# Altium PCB ESP32-AXIS3-6.0.PcbDoc (part 1 of 2)
Units mm, origin at the board's own origin, x right, y up, seen from the top; angles counter-clockwise.
Board outline 90.12 x 69.99 mm, 2 copper layers (TopLayer, BottomLayer); 125 components, 102 nets, 464 pads, 321 vias.
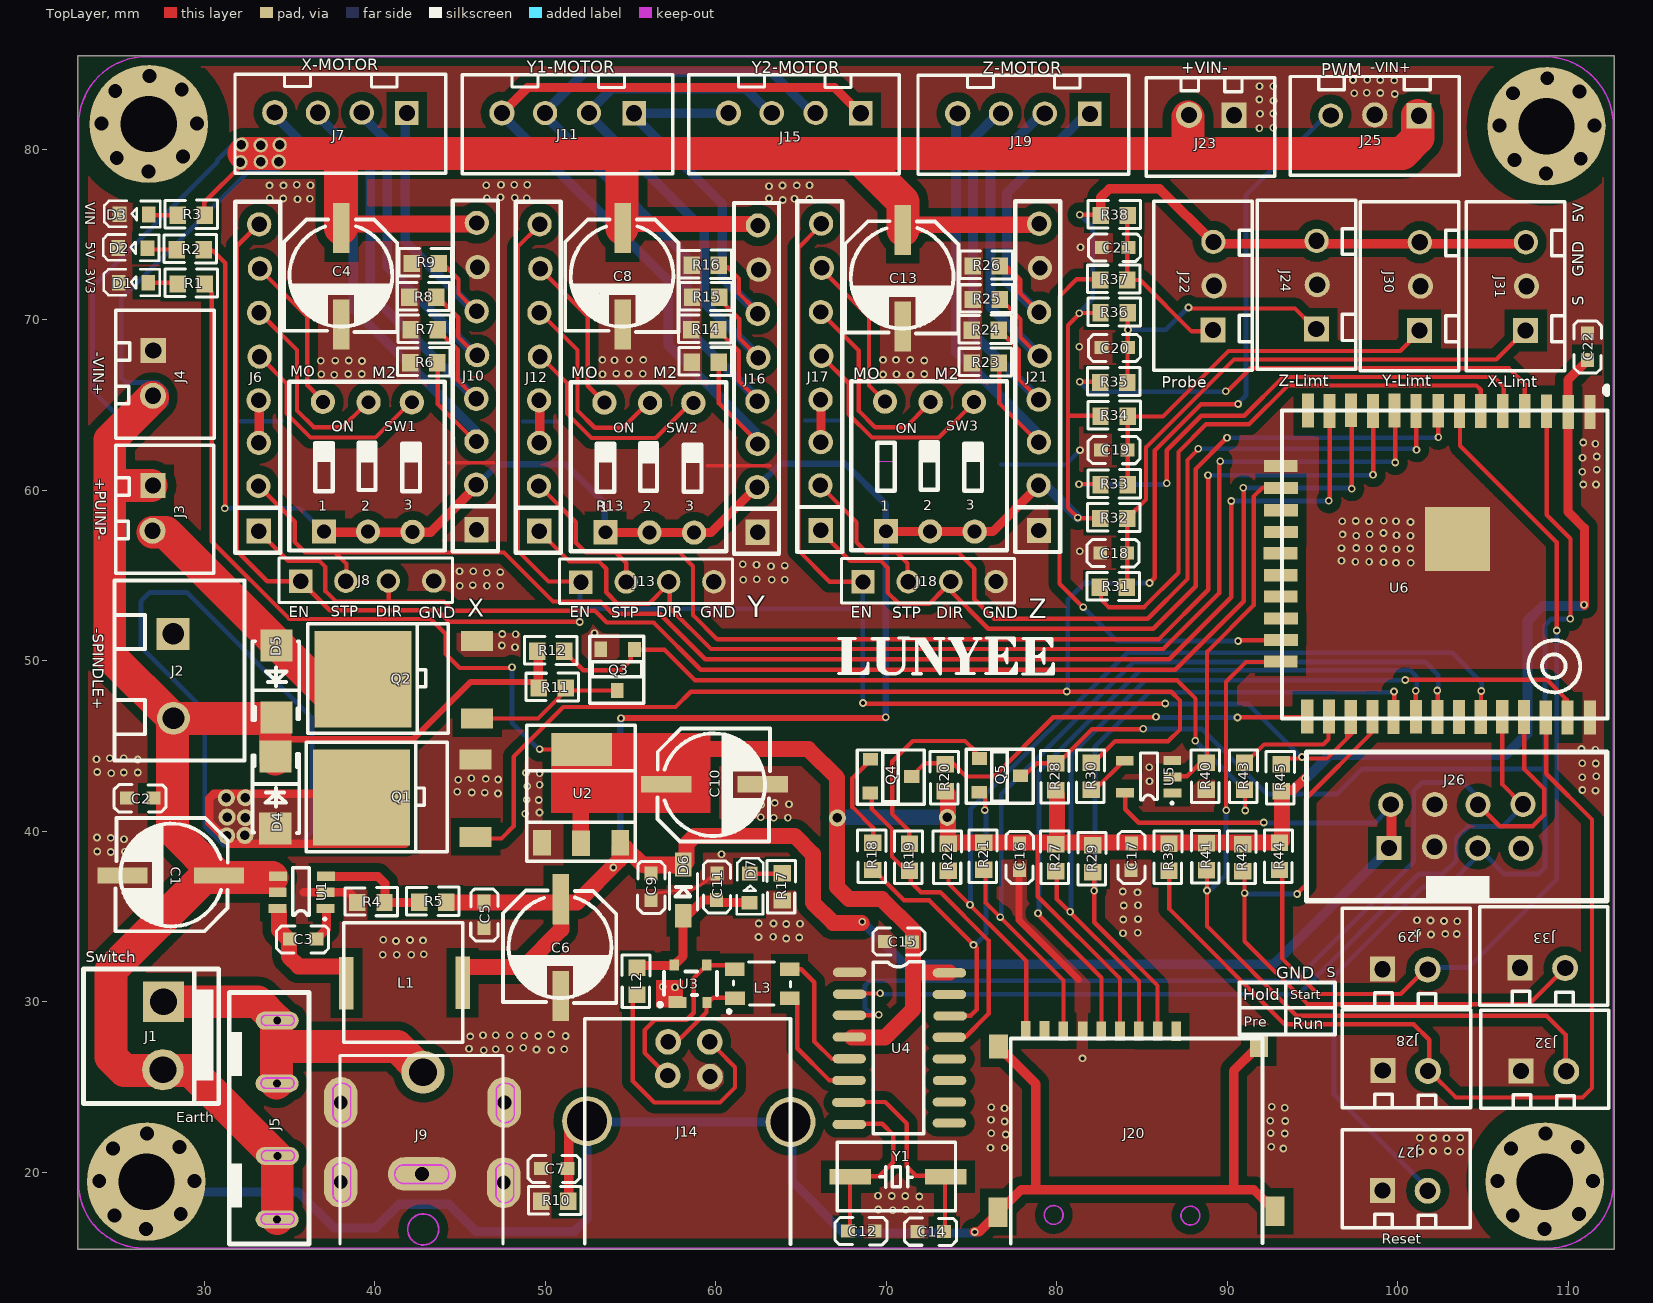
[diagram p0: TopLayer view]
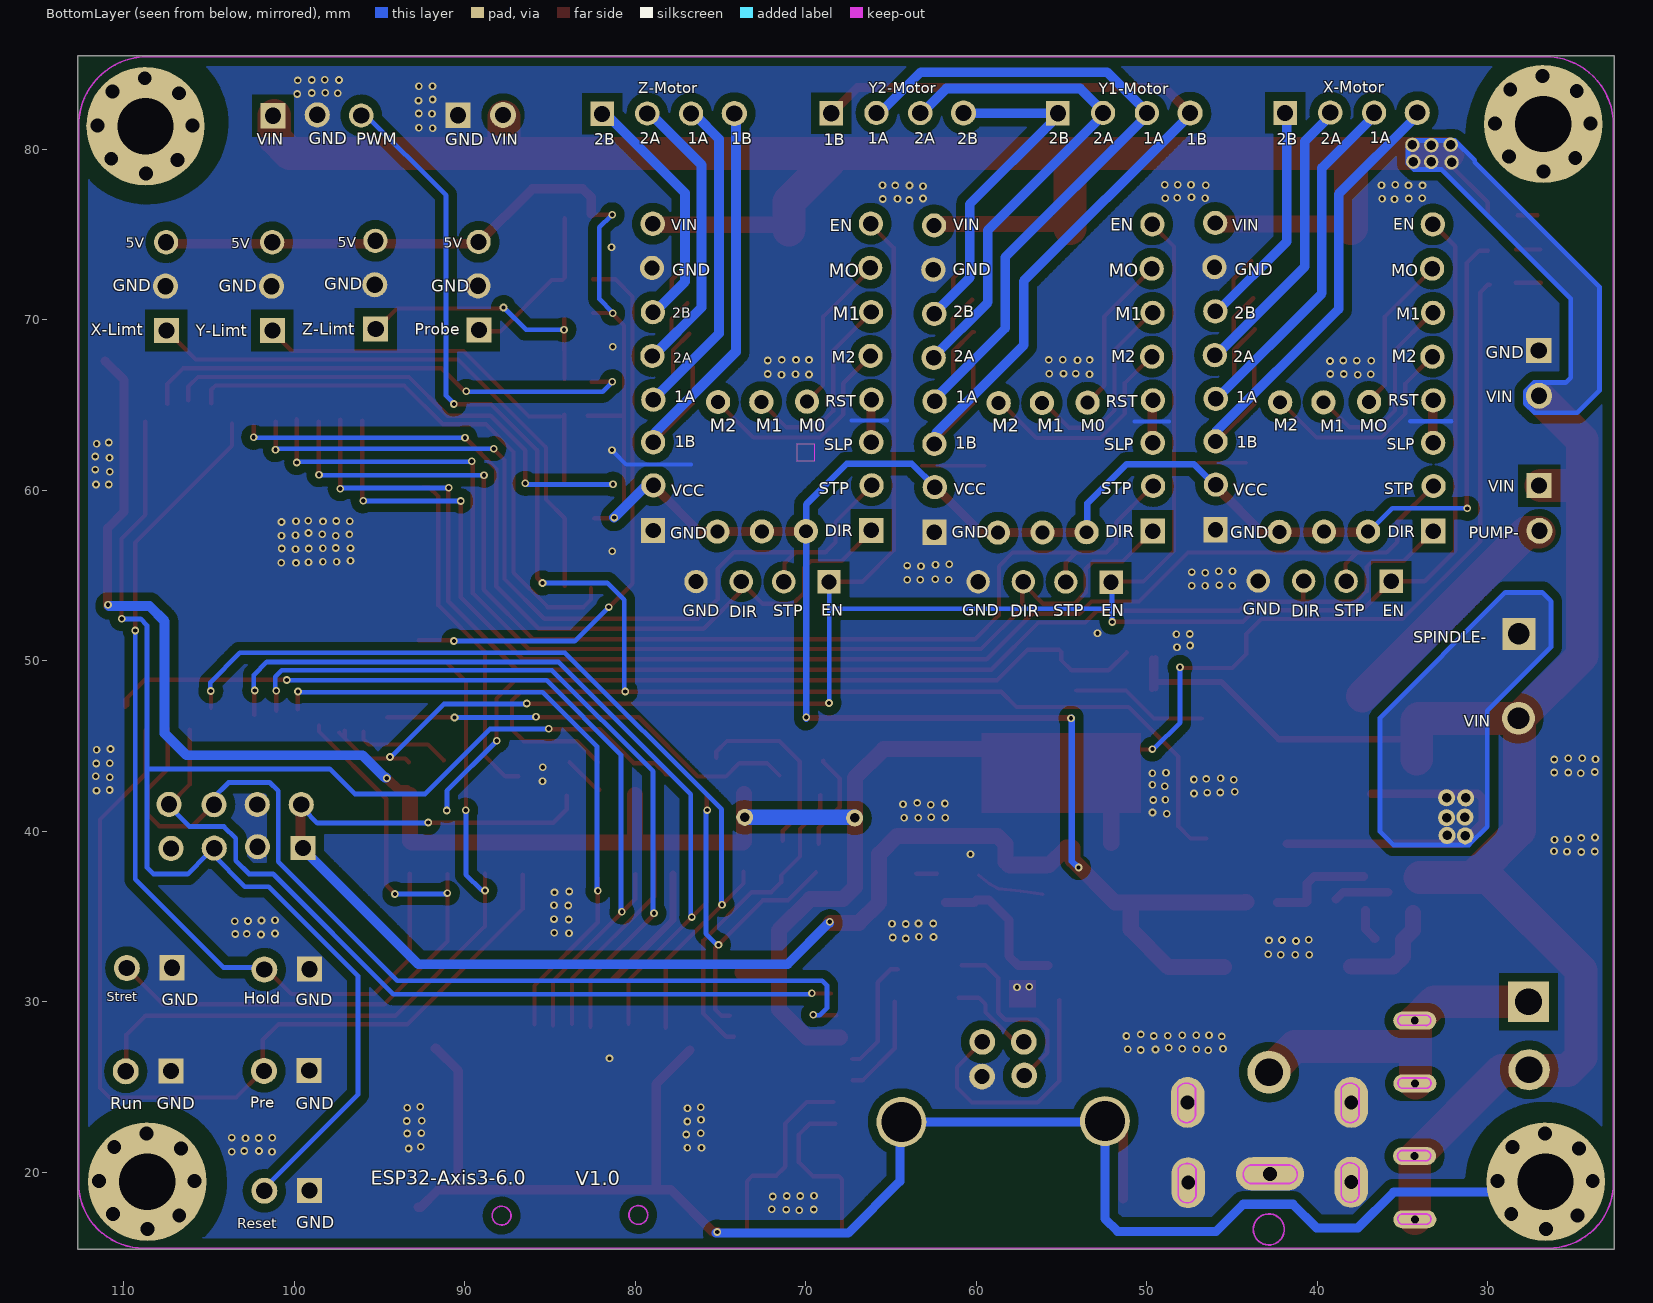
[diagram p1: BottomLayer view, seen from below]

## Layer stack, top to bottom
TopSolder: solder mask 0.0102, Solder Resist, Dk 3.5
TopLayer: signal copper 0.0356
Dielectric1: core 0.32, FR-4, Dk 4.8
BottomLayer: signal copper 0.0356
BottomSolder: solder mask 0.0102, Solder Resist, Dk 3.5

## Board outline
22.572,15.502 112.694,15.502 112.694,85.495 22.572,85.495

## Design rules (kind name [scope] priority, off if disabled: settings)
AssemblyTestPointUsage [All] p0: scope1count=1 scope1_0_kind=Board scope1_0_value=Board scope2count=1 scope2_0_kind=Board scope2_0_value=Board commentlength=0
AssemblyTestpoint [All] p0: scope1count=1 scope1_0_kind=Board scope1_0_value=Board scope2count=1 scope2_0_kind=Board scope2_0_value=Board commentlength=0
Clearance [All] p0: scope1count=1 scope1_0_kind=Board scope1_0_value=Board scope2count=1 scope2_0_kind=Board scope2_0_value=Board commentlength=0 gap=0.2
Clearance [All] p1: gap=0.2
ComponentClearance [All] p0: scope1count=1 scope1_0_kind=Board scope1_0_value=Board scope2count=1 scope2_0_kind=Board scope2_0_value=Board commentlength=0 gap=0.254 collisioncheckmode=3
DiffPairsRouting [All] p0: scope1count=1 scope1_0_kind=Board scope1_0_value=Board scope2count=1 scope2_0_kind=Board scope2_0_value=Board commentlength=0
FabricationTestPointUsage TestPointUsage [All] p0: scope1count=1 scope1_0_kind=Board scope1_0_value=Board scope2count=1 scope2_0_kind=Board scope2_0_value=Board commentlength=0 valid=0 allowmultiple=FALSE
FabricationTestPointUsage TestPointUsage [All] p1: valid=0 allowmultiple=FALSE
FabricationTestpoint Testpoint [All] p0: scope1count=1 scope1_0_kind=Board scope1_0_value=Board scope2count=1 scope2_0_kind=Board scope2_0_value=Board commentlength=0 side=3 testpointundercomponent=TRUE minsize=1.016 maxsize=2.54 preferedsize=1.524 minholesize=0.508 maxholesize=1.016 preferedholesize=0.813 testpointgrid=0.025
FabricationTestpoint Testpoint [All] p1: side=3 testpointundercomponent=TRUE minsize=1.016 maxsize=2.54 preferedsize=1.524 minholesize=0.508 maxholesize=1.016 preferedholesize=0.813 testpointgrid=0.025 allowsidetop=TRUE allowsidebottom=TRUE usegrid=TRUE gridtolerance=0
FanoutControl Fanout_BGA [All] p0 off: scope1count=1 scope1_0_kind=Board scope1_0_value=Board scope2count=1 scope2_0_kind=Board scope2_0_value=Board commentlength=69 // Protel DXP Scope 1 Expression Was: IsBGA   Fanout_BGA (Default Rule)
FanoutControl Fanout_LCC [All] p0 off: scope1count=1 scope1_0_kind=Board scope1_0_value=Board scope2count=1 scope2_0_kind=Board scope2_0_value=Board commentlength=69 // Protel DXP Scope 1 Expression Was: IsLCC   Fanout_LCC (Default Rule)
FanoutControl Fanout_SOIC [All] p0 off: scope1count=1 scope1_0_kind=Board scope1_0_value=Board scope2count=1 scope2_0_kind=Board scope2_0_value=Board commentlength=71 // Protel DXP Scope 1 Expression Was: IsSOIC   Fanout_SOIC (Default Rule)
FanoutControl Fanout_Small [All] p0 off: scope1count=1 scope1_0_kind=Board scope1_0_value=Board scope2count=1 scope2_0_kind=Board scope2_0_value=Board commentlength=84 // Protel DXP Scope 1 Expression Was: (CompPinCount < 5)   Fanout_Small (Default Rule)
FanoutControl Fanout_Default [All] p0: scope1count=1 scope1_0_kind=Board scope1_0_value=Board scope2count=1 scope2_0_kind=Board scope2_0_value=Board commentlength=30 // Fanout_Default (Default Rule)
Height [All] p0: scope1count=1 scope1_0_kind=Board scope1_0_value=Board scope2count=1 scope2_0_kind=Board scope2_0_value=Board commentlength=0
HoleSize [All] p0: scope1count=1 scope1_0_kind=Board scope1_0_value=Board scope2count=1 scope2_0_kind=Board scope2_0_value=Board commentlength=0 absolutevalues=TRUE maxlimit=2.54 minlimit=0.025 maxpercent=80.000 minpercent=20.000
HoleToHoleClearance [All] p0: scope1count=1 scope1_0_kind=Board scope1_0_value=Board scope2count=1 scope2_0_kind=Board scope2_0_value=Board commentlength=0
LayerPairs [All] p0: scope1count=1 scope1_0_kind=Board scope1_0_value=Board scope2count=1 scope2_0_kind=Board scope2_0_value=Board commentlength=0 enforce=TRUE
MinimumSolderMaskSliver [All] p0: scope1count=1 scope1_0_kind=Board scope1_0_value=Board scope2count=1 scope2_0_kind=Board scope2_0_value=Board commentlength=0
NetAntennae [All] p0: scope1count=1 scope1_0_kind=Board scope1_0_value=Board scope2count=1 scope2_0_kind=Board scope2_0_value=Board commentlength=0
PasteMaskExpansion [All] p0: scope1count=1 scope1_0_kind=Board scope1_0_value=Board scope2count=1 scope2_0_kind=Board scope2_0_value=Board commentlength=0 expansion=0
PlaneClearance [All] p0: scope1count=1 scope1_0_kind=Board scope1_0_value=Board scope2count=1 scope2_0_kind=Board scope2_0_value=Board commentlength=0 clearance=0.508
PlaneConnect [All] p0: scope1count=1 scope1_0_kind=Board scope1_0_value=Board scope2count=1 scope2_0_kind=Board scope2_0_value=Board commentlength=0 planeconnectstyle=Relief reliefexpansion=0.508 reliefentries=4 reliefconductorwidth=0.254 reliefairgap=0.254
PolygonConnect [All] p0: scope1count=1 scope1_0_kind=Board scope1_0_value=Board scope2count=1 scope2_0_kind=Board scope2_0_value=Board commentlength=0 connectstyle=Relief reliefconductorwidth=0 reliefentries=4 polygonreliefangle="90 Angle"
PolygonConnect [All] p1: connectstyle=Relief reliefconductorwidth=0 reliefentries=4 polygonreliefangle="90 Angle" airgapwidth=0.254
RoutingCorners [All] p0: scope1count=1 scope1_0_kind=Board scope1_0_value=Board scope2count=1 scope2_0_kind=Board scope2_0_value=Board commentlength=0 cornerstyle=45-Degree minsetback=2.54 maxsetback=2.54
RoutingLayers [All] p0: scope1count=1 scope1_0_kind=Board scope1_0_value=Board scope2count=1 scope2_0_kind=Board scope2_0_value=Board commentlength=0 top layer=Horizontal bottom layer=Vertical
RoutingPriority [All] p0: scope1count=1 scope1_0_kind=Board scope1_0_value=Board scope2count=1 scope2_0_kind=Board scope2_0_value=Board commentlength=0
RoutingTopology [All] p0: scope1count=1 scope1_0_kind=Board scope1_0_value=Board scope2count=1 scope2_0_kind=Board scope2_0_value=Board commentlength=0 topology=Shortest
RoutingVias [All] p0: scope1count=1 scope1_0_kind=Board scope1_0_value=Board scope2count=1 scope2_0_kind=Board scope2_0_value=Board commentlength=0 holewidth=0.711 width=1.27 viastyle="Through Hole" minholewidth=0.711 minwidth=1.27 maxholewidth=0.711 maxwidth=1.27
RoutingVias [All] p1: holewidth=0.711 width=1.27 viastyle="Through Hole" minholewidth=0.711 minwidth=1.27 maxholewidth=0.711 maxwidth=1.27
ShortCircuit [All] p0: scope1count=1 scope1_0_kind=Board scope1_0_value=Board scope2count=1 scope2_0_kind=Board scope2_0_value=Board commentlength=0 allowed=FALSE
SilkToBoardRegionClearance [All] p0: scope1count=1 scope1_0_kind=Board scope1_0_value=Board scope2count=1 scope2_0_kind=Board scope2_0_value=Board commentlength=0
SilkToSilkClearance [All] p0: scope1count=1 scope1_0_kind=Board scope1_0_value=Board scope2count=1 scope2_0_kind=Board scope2_0_value=Board commentlength=0
SilkToSolderMaskClearance [All] p0 off: scope1count=1 scope1_0_kind=Board scope1_0_value=Board scope2count=1 scope2_0_kind=Board scope2_0_value=Board commentlength=44 // Protel DXP Scope 1 Expression Was: IsPad
SolderMaskExpansion [All] p0: scope1count=1 scope1_0_kind=Board scope1_0_value=Board scope2count=1 scope2_0_kind=Board scope2_0_value=Board commentlength=0 expansion=0.102
SolderMaskExpansion [All] p1: expansion=0.102
UnRoutedNet [All] p0: scope1count=1 scope1_0_kind=Board scope1_0_value=Board scope2count=1 scope2_0_kind=Board scope2_0_value=Board commentlength=0
UnpouredPolygon [All] p0: scope1count=1 scope1_0_kind=Board scope1_0_value=Board scope2count=1 scope2_0_kind=Board scope2_0_value=Board commentlength=0
Width [All] p0: scope1count=1 scope1_0_kind=Board scope1_0_value=Board scope2count=1 scope2_0_kind=Board scope2_0_value=Board commentlength=0 maxlimit=0.254 minlimit=0.254 preferedwidth=0.254
Width [All] p1: maxlimit=0.254 minlimit=0.254 preferedwidth=0.254
28 further rules are at their usual default settings.

## Components (designator, comment, footprint, x,y, rotation, side; value= is the part's Value field where it differs from the comment)
C1 "100 35V VT" 9 29.205,37.973 r270 top locked
C2 "100NF" 11 26.982,41.656 r0 top locked
C3 "100NF" 11 36.528,33.38 r0 top locked
C4 "100 35V VT" 9 37.481,73.724 r0 top locked
C5 "100NF" 11 46.71,35.856 r90 top locked
C6 "100 35V VT" 9 50.329,34.353 r0 top locked
C7 "NC" 11 51.26,19.918 r0 top locked
C8 "100 35V VT" 9 53.97,73.724 r0 top locked
C9 "100NF" 11 56.499,37.486 r90 top locked
C10 "100 35V VT" 9 58.753,42.206 r90 top locked
C11 "100NF" 11 60.351,37.497 r90 top locked
C12 "33PF" 11 69.273,16.267 r0 top locked
C13 "100 35V VT" 9 70.395,73.618 r0 top locked
C14 "33PF" 11 73.348,16.235 r0 top locked
C15 "100NF" 11 69.972,33.824 r180 top locked
C16 "100NF" 11 78.1,39.243 r90 top locked
C17 "100NF" 11 84.661,39.243 r90 top locked
C18 "10NF" 11 84.069,56.039 r0 top locked
C19 "10NF" 11 84.111,62.082 r0 top locked
C20 "10NF" 11 84.143,68.072 r0 top locked
C21 "10NF" 11 84.153,73.956 r0 top locked
C22 "100NF" 11 111.416,69.173 r90 top locked
D1 "红光" D 26.622,72.147 r0 top locked
D2 "红光" D 26.591,74.189 r0 top locked
D3 "红光" D 26.654,76.158 r0 top locked
D4 "SS34" 14 33.65,40.195 r180 top locked
D5 "SS34" 14 34.75,50.863 r0 top locked
D6 "NC" D1 58.521,34.936 r0 top locked
D7 "红光" D 61.95,35.899 r270 top locked
J1 "CON2-3.96MM针座,黑塑" 18 27.088,29.252 r0 top locked
J2 "CON2-5.08MM,接线座,黑塑" 13 28.337,50.398 r0 top locked
J3 "CON2-2.54MM,黑塑" 2 26.94,60.071 r90 top locked
J4 "CON2-2.54MM,黑塑" 2 26.961,67.987 r90 top locked
J5 "插座,黑塑" 19 34.74,28.75 r0 top locked
J6 "CON8-2.54MM,黄塑" 7 33.756,58.547 r0 top locked
J7 "CON4-2.54MM,黑塑" 1 41.333,81.852 r0 top locked
J8 "SIP4-2.54MM,黑塑" 12 35.883,54.642 r0 top locked
J9 "电源插座,黑塑" 21 47.091,19.754 r0 top locked
J10 "CON8-2.54MM,黄塑" 7 46.519,58.632 r0 top locked
J11 "CON4-2.54MM,黑塑" 1 54.658,81.83 r0 top locked
J12 "CON8-2.54MM,黄塑" 7 50.202,58.547 r0 top locked
J13 "SIP4-2.54MM,黑塑" 12 52.319,54.599 r0 top locked
J14 "USB-B，白塑" 22 57.579,27.152 r0 top locked
J15 "CON4-2.54MM,黑塑" 1 67.95,81.83 r0 top locked
J16 "CON8-2.54MM,黄塑" 7 63.008,58.483 r0 top locked
J17 "CON8-2.54MM,黄塑" 7 66.712,58.589 r0 top locked
J18 "SIP4-2.54MM,黑塑" 12 68.86,54.61 r0 top locked
J19 "CON4-2.54MM,黑塑" 1 81.391,81.799 r0 top locked
J20 "TF卡座" 6 78.311,28.474 r0 top locked
J21 "CON8-2.54MM,黄塑" 7 79.507,58.584 r0 top locked
J22 "CON3-2.54MM,黑塑" 3 88.831,69.448 r270 top locked
J23 "CON2-2.54MM,黑塑" 2 90.186,82.042 r0 top locked
J24 "CON3-2.54MM,黑塑" 3 94.885,69.511 r270 top locked
J25 "CON3-2.54MM,黑塑" 3 101.193,81.64 r0 top locked
J26 "CON4X2-2.54MM,黑塑" 5 100.166,39.021 r0 top locked
J27 "CON2-2.54MM,黑塑" 2 99.309,18.902 r180 top locked
J28 "CON2-2.54MM,黑塑" 2 99.33,25.929 r180 top locked
J29 "CON2-2.54MM,黑塑" 2 99.309,31.877 r180 top locked
J30 "CON3-2.54MM,黑塑" 3 100.939,69.427 r270 top locked
J31 "CON3-2.54MM,黑塑" 3 107.162,69.427 r270 top locked
J32 "CON2-2.54MM,黑塑" 2 107.437,25.908 r180 top locked
J33 "CON2-2.54MM,黑塑" 2 107.373,31.962 r180 top locked
L1 "4.7UH" 20 38.084,31.432 r0 top locked
L2 "1UH" 10 55.494,30.321 r90 top locked
L3 "0.22UHX2共模" 24 61.844,30.131 r0 top locked
Q1 "SN25N06K" 15 45.016,40.026 r0 top locked
Q2 "SN25N06K" 15 45.101,46.969 r0 top locked
Q3 "Y1" 16 55.24,50.62 r0 top locked
Q4 "Y1" 16 69.125,44.238 r90 top locked
Q5 "Y1" 16 75.517,44.281 r90 top locked
R1 "1.69K 1%" 10 28.326,71.988 r0 top locked
R2 "1.69K 1%" 10 28.284,73.999 r0 top locked
R3 "1.69K 1%" 10 28.326,76.02 r0 top locked
R4 "1.69K 1%" 10 38.878,35.708 r0 top locked
R5 "9.1K 5%" 10 42.497,35.729 r0 top locked
R6 "1.69K 1%" 10 41.968,67.373 r0 top locked
R7 "1.69K 1%" 10 41.989,69.3 r0 top locked
R8 "1.69K 1%" 10 41.926,71.205 r0 top locked
R9 "1.69K 1%" 10 42.053,73.194 r0 top locked
R10 "NC" 10 49.652,18.182 r0 top locked
R11 "10K 5%" 10 49.504,48.292 r0 top locked
R12 "10K 5%" 10 49.429,50.44 r0 top locked
R13 "1.69K 1%" 10 58.478,67.395 r0 top locked
R14 "1.69K 1%" 10 58.457,69.3 r0 top locked
R15 "1.69K 1%" 10 58.499,71.205 r0 top locked
R16 "1.69K 1%" 10 58.478,73.088 r0 top locked
R17 "1.69K 1%" 10 64.003,35.846 r90 top locked
R18 "10K 5%" 10 69.316,37.634 r90 top locked
R19 "10K 5%" 10 71.475,37.592 r90 top locked
R20 "10K 5%" 10 73.57,42.249 r90 top locked
R21 "10K 5%" 10 75.835,37.655 r90 top locked
R22 "10K 5%" 10 73.739,37.592 r90 top locked
R23 "1.69K 1%" 10 74.904,67.352 r0 top locked
R24 "1.69K 1%" 10 74.904,69.278 r0 top locked
R25 "1.69K 1%" 10 74.967,71.078 r0 top locked
R26 "1.69K 1%" 10 74.967,73.046 r0 top locked
R27 "10K 5%" 10 80.047,37.571 r90 top locked
R28 "10K 5%" 10 80.047,42.312 r90 top locked
R29 "10K 5%" 10 82.227,37.507 r90 top locked
R30 "47R 5%" 10 82.143,42.333 r90 top locked
R31 "47R 5%" 10 82.418,54.197 r0 top locked
R32 "10K 5%" 10 82.449,58.24 r0 top locked
R33 "47R 5%" 10 82.46,60.219 r0 top locked
R34 "10K 5%" 10 82.46,64.23 r0 top locked
R35 "47R 5%" 10 82.449,66.209 r0 top locked
R36 "10K 5%" 10 82.46,70.294 r0 top locked
R37 "47R 5%" 10 82.439,72.221 r0 top locked
R38 "10K 5%" 10 82.471,76.01 r0 top locked
R39 "10K 5%" 10 86.693,37.592 r90 top locked
R40 "10K 5%" 10 88.874,42.333 r90 top locked
R41 "NC" 10 88.895,37.613 r90 top locked
R42 "10K 5%" 10 91.011,37.571 r90 top locked
R43 "47R 5%" 10 91.117,42.333 r90 top locked
R44 "10K 5%" 10 93.17,37.634 r90 top locked
R45 "10K 5%" 10 93.276,42.249 r90 top locked
SW1 "3位拨码开关" 8#1 37.693,57.129 r0 top locked
SW2 "3位拨码开关" 8#1 54.203,57.087 r0 top locked
SW3 "3位拨码开关" 8#2 70.66,57.145 r0 top locked
U1 "GBG4S" U 36.92,35.369 r0 top locked
U2 "CJT1117B-3.3" 17 49.863,39.349 r0 top locked
U3 "R05" 23 57.584,30.215 r0 top locked
U4 "CH340G" 25 68.215,31.538 r0 top locked
U5 "C17J" U1 86.662,42.206 r0 top locked
U6 "ESP32-WROOM-32U" 4 111.49,64.775 r0 top locked
Y1 "12.000MHZ" 26 68.681,20.045 r0 top locked

## Footprints (in the part's own frame and the unit in brackets; to place one, negate y for a bottom-side part, rotate by r counter-clockwise, add the part's x,y. Pads: shape width x height; smd on the part's side, far side on the other; paste and mask are expansions set on the pad)
1 [mil]
  rect 54x56 hole 37.4: 1(21.46,11.25)
  round 56 hole 37.4: 2(-82.71,12.08) 3(-183.96,11.88)
  round 58 hole 37.4: 4(-283.75,12.08)
  silkscreen extent -375,-128 111,100
2 [mil]
  rect 58x58 hole 37.4: 1(8.33,-1.67)
  round 60 hole 37.4: 2(-96.04,-0.83)
  silkscreen extent -194,-142 102,85
3 [mil]
  rect 58x58 hole 37.4: 1(1.87,13.12)
  round 58 hole 37.4: 2(-100.42,15.21)
  round 56 hole 37.4: 3(-201.88,13.75)
  silkscreen extent -296,-124 95,104
4 [mil]
  rect 26x78 smd: 1(-8.96,-7.08) 2(-58.96,-6.88) 3(-108.96,-5.21) 4(-159.17,-4.79) 5(-210,-4.79) 6(-260.83,-4.58) 7(-310.21,-4.38) 8(-359.17,-4.17) 9(-410.21,-4.38)
  rect 28x78 smd: 10(-460.21,-3.33) 11(-509.79,-4.58) 12(-560.42,-2.92) 13(-610.21,-4.79) 14(-659.79,-3.54) 25(-661.67,-709.79) 26(-611.67,-710.21) 27(-561.25,-711.04) 28(-511.25,-710.62) 29(-462.08,-711.04) 30(-410.83,-710.62) 31(-360.83,-711.46) 32(-310.83,-711.04) 33(-260.83,-711.04) 34(-211.25,-710.62) 35(-160.83,-711.46) 36(-110.83,-712.29) 37(-60.42,-712.71) 38(-8.33,-712.29)
  rect 78x28 smd: 15(-722.71,-131.88) 16(-722.5,-182.71) 17(-722.5,-233.96) 18(-722.08,-283.96) 19(-723.33,-333.12) 20(-722.92,-383.96) 21(-722.92,-433.12) 22(-722.08,-483.96) 23(-722.5,-533.12) 24(-722.92,-582.71)
  rect 150x148 smd: 39(-314.17,-300.42)
  silkscreen extent -720,-715 31,53
5 [mil]
  rect 58x56 hole 37.4: 1(-26.67,0.21)
  round 58 hole 37.4: 2(-22.92,100.62) 3(77.92,3.12) 4(78.75,100.62) 5(177.92,-0.21) 6(178.33,100.21) 7(277.92,-0.62) 8(282.5,101.04)
  silkscreen extent -218,-122 476,222
6 [mil]
  rect 22x44 smd: 1(-5.42,-6.46) 2(37.92,-6.25) 3(81.25,-6.88) 4(125.83,-6.88) 5(169.38,-7.08) 6(212.29,-6.88) 7(256.04,-7.5) 8(299.17,-7.29) 9(341.88,-7.71)
  rect 44x56 smd: 10(-68.33,-42.71)
  rect 42x54 smd: 11(532.92,-40.62)
  rect 44x68 smd: 12(-69.17,-425.21) 13(570.42,-423.54)
  silkscreen extent -40,-498 541,-24
7 [mil]
  rect 56x58 hole 35.43: 1(-22.08,-36.88)
  round 56 hole 35.43: 2(-22.92,67.29) 3(-22.08,166.88) 4(-22.5,265.21) 5(-20.42,366.04) 6(-21.67,467.29) 7(-19.58,569.38) 8(-21.25,671.46)
  silkscreen extent -77,-87 28,723
8#1 [mil]
  rect 56x56 / inner round 56 / far side round 56 hole 32: 1(-26.67,18.12)
  round 56 hole 32: 2(75,17.71) 3(177.92,17.29) 4(176.25,316.46) 5(76.25,316.46) 6(-29.17,317.29)
  silkscreen extent -107,-26 252,364
8#2 [mil]
  rect 56x56 / inner round 56 / far side round 56 hole 32: 1(-26.67,18.12)
  round 56 hole 32: 2(75,17.71) 3(177.92,17.29) 4(176.25,316.46) 5(76.25,316.46) 6(-29.17,317.29)
  KeepOutLayer region: -46.25,179.17 -6.67,179.17 -6.67,220 -46.25,220
  silkscreen extent -107,-26 252,364
9 [mil]
  rect 38x116 smd: 1(22.08,65.42) 2(22.08,-157.5)
  silkscreen extent -110,-174 151,85
10 [mil]
  rect 38x40 smd: 1(3.96,4.58) 2(66.46,4.58)
  silkscreen extent -25,-26 96,39
11 [mil]
  rect 32x30 smd: 1(1.67,11.67) 2(-60,11.88)
  silkscreen extent -90,-20 30,43
12 [mil]
  rect 54x54 hole 35.43: 1(-9.17,0.83)
  round 54 hole 35.43: 2(95.21,1.04) 3(193.33,1.67) 4(297.92,1.67)
  silkscreen extent -59,-48 341,55
13 [mil]
  rect 76x74 hole 50: 1(-6.67,46.88)
  round 76 hole 50: 2(-5.83,-148.12)
  silkscreen extent -142,-246 158,170
14 [mil]
  rect 74x74 smd: 1(-20,1.04) 2(-20.42,-164.79)
  silkscreen extent -75,-171 32,11
15 [mil]
  rect 74x46 smd: 1(35.42,-13.54) 3(35,164.79)
  rect 224x222 smd: 2(-228.75,76.88)
  silkscreen extent -356,-48 -31,205
16 [mil]
  rect 29.37x35.37 smd: 1(-0.42,2.08) 2(-78.33,2.5) 3(-40.21,-92.71)
  silkscreen extent -104,-122 21,33
17 [mm]
  rect 1.051x1.508 smd: 1(-0.053,-0.021) 2(2.233,-0.042) 3(4.53,-0.021)
  rect 3.54x1.914 smd: 4(2.275,5.45)
  silkscreen extent -0.94,-1.09 5.42,6.87
18 [mil]
  rect 95.37x93.37 hole 62: 1(20.42,29.79)
  round 95.37 hole 62: 2(18.75,-127.29)
  silkscreen extent -165,-205 148,105
19 [mil]
  oval 99.37x41.37 hole 18: 1(-18.33,6.04) 2(-18.75,-138.96) 3(-17.92,-306.67) 4(-18.54,-452.92)
  KeepOutLayer lines w3.94: -45.21,-150 12.5,-150 ; -45,-463.96 12.71,-463.96 ccw(c8.33,-452.29) 11.96,-440.37 -45.21,-440.37 ccw(c-43.75,-452.29) -44.22,-464.29 ; -44.79,-5 12.92,-5 ; -44.43,-150.33 cw(c-43.96,-138.33) -45.42,-126.41 11.75,-126.41 cw(c8.12,-138.33) 12.5,-150 ; -44.38,-317.71 13.33,-317.71 ccw(c8.96,-306.04) 12.59,-294.12 -44.58,-294.12 ccw(c-43.12,-306.04) -43.6,-318.04 ; -44.01,-5.33 cw(c-43.54,6.67) -45,18.59 12.17,18.59 cw(c8.54,6.67) 12.92,-5
  silkscreen extent -130,-510 55,71
20 [mm]
  rect 0.85x3.083 smd: 1(0.243,-0.333) 2(7.059,-0.312)
  silkscreen extent 0.1,-3.79 7.07,3.21
21 [mil]
  round 99.37 hole 64: 1(-167.92,241.04)
  oval 77.37x117.37 hole 32: 2(-357.92,171.25) 3(19.79,171.25) 4(-357.92,-12.71) 5(18.54,-13.96)
  oval 157.37x77.37 hole 32: 6(-170.42,6.25)
  KeepOutLayer circle w3.94: c-167.5,-122.29 r35.85
  KeepOutLayer lines w3.94: -376.04,18.96 -376.04,-42.08 ccw(c-355.42,-38.33) -334.87,-42.48 -334.87,20.42 ccw(c-355,8.12) -375.81,19.23 ; -376.04,202.92 -376.04,141.88 ccw(c-355.42,145.62) -334.87,141.48 -334.87,204.38 ccw(c-355,192.08) -375.81,203.18 ; -215.83,-15.83 -123.33,-15.83 ; -215.66,-15.88 cw(c-211.46,5.42) -215,26.83 -125.23,26.83 cw(c-130.83,5.21) -123.33,-15.83 ; 0.42,-43.33 0.42,17.71 ; 0.42,-43.33 ccw(c21.04,-39.58) 41.59,-43.73 41.59,19.17 ccw(c21.46,6.88) 0.65,17.98 ; 1.67,141.88 1.67,202.92 ; 1.67,141.87 ccw(c22.29,145.62) 42.84,141.48 42.84,204.38 ccw(c22.71,192.08) 1.9,203.18
  silkscreen extent -360,-156 17,280
22 [mm]
  round 1.508 hole 0.9: 1(-0.376,0.503) 2(2.058,0.503) 3(-0.402,-1.466) 4(2.074,-1.529)
  round 2.93 hole 2.337: 5(-5.133,-4.143) 6(6.805,-4.196)
  silkscreen extent -5.27,-11.37 6.79,1.86
23 [mm]
  rect 0.848x0.695 smd: 1(0.048,-0.212)
  rect 0.543x0.644 smd: 2(1.894,-0.259) 3(1.889,1.942) 4(-0.021,1.942)
  silkscreen extent -0.97,-0.48 2.49,1.57
24 [mm]
  rect 1.152x0.797 smd: 1(-0.725,0.079) 2(2.487,0.09) 3(2.487,1.773) 4(-0.73,1.789)
  silkscreen extent -1.17,-0.8 2.53,2.2
25 [mil]
  oval 77.37x21.37 smd: 1(-14.58,7.71) 2(-14.58,-42.71) 3(-15,-91.46) 4(-15,-141.88) 5(-15.42,-191.88) 6(-15.83,-241.87) 7(-16.25,-292.71) 8(-15.42,-343.54) 9(215.83,-340.21) 10(215.83,-291.87) 11(216.25,-242.29) 12(215.83,-192.29) 13(215.42,-142.29) 14(217.5,-93.12) 15(215.83,-43.54) 16(215.83,6.46)
  silkscreen extent 40,-365 156,32
26 [mm]
  rect 2.422x0.898 smd: 1(-0.804,-0.291) 2(4.794,-0.302)
  silkscreen extent -1.57,-2.31 5.38,1.74
D [mil]
  rect 32x36 smd: 1(3.33,0.83) 2(-64.58,1.04)
  silkscreen extent -99,-29 30,32
D1 [mm]
  rect 0.949x1.406 smd: 1(-0.434,0.116) 2(-0.434,3.122)
  silkscreen extent -1.23,0.46 0.39,2.66
U [mm]
  rect 1.051x0.543 smd: 1(0.196,0.111) 2(0.201,1.064) 3(0.212,2) 4(-2.609,2.006) 5(-2.614,1.064) 6(-2.625,0.111)
  silkscreen extent -1.73,-0.51 0.15,2.49
U1 [mil]
  rect 41.37x21.37 smd: 1(4.58,1.88) 2(5,38.96) 3(4.17,76.67) 4(-105.42,76.25) 5(-105.21,2.08)
  silkscreen extent -70,-24 6,94

## Free pads (board coordinates)
  round 1.305 hole 0.813: 4(29.565,81.518) 5(28.676,83.518) 6(26.781,84.302) 7(24.77,83.423) 8(23.977,81.529) 9(24.866,79.497) 10(26.718,78.703) 11(28.75,79.581) 13(111.543,81.391) 14(110.654,83.391) 15(108.76,84.175) 16(106.749,83.296) 17(105.955,81.402) 18(106.844,79.37) 19(108.696,78.576) 20(110.728,79.454) 22(111.437,19.489) 23(110.548,21.489) 24(108.654,22.273) 25(106.643,21.394) 26(105.849,19.5) 27(106.738,17.468) 28(108.59,16.674) 29(110.622,17.552) 31(29.427,19.489) 32(28.538,21.489) 33(26.644,22.273) 34(24.633,21.394) 35(23.839,19.5) 36(24.728,17.468) 37(26.58,16.674) 38(28.612,17.552)
  rect 0.695x0.644 smd: 5(57.938,29.977)
  round 6.944 hole 3.302: 12(26.739,81.486) 21(108.717,81.359) 30(108.611,19.457) 39(26.601,19.457)
  round 0.848 hole 0.559 mask+0: 40(32.173,80.275) 41(32.115,79.243) 42(33.3,80.248) 43(33.311,79.264) 44(34.412,80.264) 45(34.353,79.28)
  round 1 hole 0.559 paste-10 mask+0: 46(31.29,41.963) 47(32.411,41.974) 48(31.332,40.841) 49(32.411,40.799) 50(31.311,39.74) 51(32.38,39.762)
  round 1 hole 0.559: 52(73.575,40.825) 53(67.125,40.788)

## Via types
v1: diameter 0.45, hole 0.25, TopLayer to BottomLayer, tented both sides, 321 vias

## Nets (pads, with @x,y where several pads share a name; then routed paths per layer and width w, separated by ;. In a path a pad name is that pad's centre, name@x,y a point inside that pad or via, vN(x,y) a via of type N, cw(c..) or ccw(c..) an arc to the next point about the centre after c; other vN are vias at no path point)
UnNamedNet1: J7.1 J10.6 R9.2 | length 16.6
  TopLayer w0.254: R9.2@43.852,73.438 44.905,72.385 44.905,71.543 45.805,70.644 J10.6@45.831,70.644
  BottomLayer w0.559: J7.1@41.772,81.825 41.772,74.591 J10.6@45.858,70.506
UnNamedNet2: J7.2 J10.5 R8.2 | length 21.2
  TopLayer w0.254: R8.2@43.746,71.268 44.895,70.12 44.895,69.003 45.937,67.961 J10.5@45.937,67.786
  BottomLayer w0.559: J7.2@39.042,81.978 39.222,81.978 40.714,80.486 40.714,73.131 J10.5@45.815,68.03
UnNamedNet3: J7.3 J10.4 R7.2 | length 25.8
  TopLayer w0.254: R7.2@43.651,69.453 44.857,68.247 44.857,66.479 45.704,65.633 J10.4@45.704,65.363
  BottomLayer w0.559: J7.3@36.555,82.074 39.719,78.909 39.719,71.554 46.006,65.267 J10.4@46.006,65.087
UnNamedNet4: J7.4 J10.3 R6.2 | length 29.1
  TopLayer w0.254: R6.2@43.693,67.299 43.693,65.072 J10.3@45.778,62.987
  BottomLayer w0.559: J7.4@34.248,81.915 34.248,81.873 38.746,77.375 38.746,70.623 45.953,63.415 J10.3@45.953,62.854
UnNamedNet5: J11.1 J15.4 J16.6 R16.2 | length 23.6
  TopLayer w0.254: R16.2@60.224,73.083 60.69,73.083 61.352,72.422 61.352,71.554 J16.6@62.219,70.686
  BottomLayer w0.559: J15.4@60.293,82.158 60.251,82.116 55.256,82.116 55.435,81.936 55.435,81.735 60.389,76.782 60.389,72.464 J16.6@62.706,70.146
UnNamedNet6: J11.2 J15.3 J16.5 R15.2 | length 34.4
  TopLayer w0.254: R15.2@60.235,71.178 60.246,71.178 61.373,70.051 61.373,68.945 J16.5@62.42,67.897
  BottomLayer w0.559: J16.5@62.717,67.871 62.468,67.871 59.309,71.03 59.309,75.269 52.684,81.894 52.684,82.349 53.906,83.571 61.748,83.571 J15.3@63.066,82.254
UnNamedNet7: J11.3 J15.2 J16.4 R14.2 | length 44.2
  TopLayer w0.254: R14.2@60.14,69.294 60.214,69.294 61.346,68.162 61.346,66.421 J16.4@62.293,65.474
  BottomLayer w0.559: J16.4@62.293,65.511 58.293,69.511 58.293,73.681 50.102,81.873 50.102,82.307 52.324,84.529 63.246,84.529 65.564,82.211 J15.2@65.86,82.211
UnNamedNet8: J11.4 J15.1 J16.3 R13.2 | length 52.5
  TopLayer w0.254: R13.2@60.172,67.336 60.172,65.119 J16.3@62.262,63.029
  TopLayer w0.533: J11.4@47.546,82.206 47.546,82.217 48.953,83.624 66.966,83.624 J15.1@68.416,82.174
  BottomLayer w0.559: J11.4@47.551,81.936 57.213,72.274 57.213,68.506 62.346,63.373 J16.3@62.346,62.791
UnNamedNet9: J19.1 J21.6 R26.2 | length 18.1
  TopLayer w0.254: R26.2@76.936,73.279 77.856,72.358 77.856,71.554 78.782,70.628 J21.6@78.782,70.448 ; R26.2@76.978,72.803 77.348,72.803
  BottomLayer w0.584: J21.6@78.751,70.57 77.078,72.242 77.078,77.449 81.703,82.074 J19.1@81.703,82.116
UnNamedNet10: J19.2 J21.5 R25.2 | length 20.2
  TopLayer w0.254: R25.2@76.93,70.982 77.867,70.046 77.867,68.982 78.793,68.056 J21.5@78.814,68.056
  BottomLayer w0.584: J21.5@78.846,67.924 78.846,67.987 76.115,70.718 76.115,79.1 J19.2@79.079,82.063
UnNamedNet11: J19.3 J21.4 R24.2 | length 23.4
  TopLayer w0.254: R24.2@76.83,69.183 77.782,68.231 77.782,66.511 78.624,65.67 J21.4@78.624,65.357
  BottomLayer w0.584: J19.3@76.465,82.116 76.465,82 75.078,80.613 75.078,69.204 J21.4@78.867,65.416
UnNamedNet12: J19.4 J21.3 R23.2 | length 26.4
  TopLayer w0.254: R23.2@76.613,67.241 76.613,65.119 78.798,62.934 J21.3@78.841,62.934
  BottomLayer w0.584: J19.4@74.094,81.968 74.094,68.13 78.814,63.41 J21.3@78.814,62.749
UnNamedNet13: C1.2 C2.2 C4.2 C5.2 C6.2 C7.2 C8.2 C9.2 C10.2 C11.1 C12.1 C13.2 C14.2 C15.1 C16.2 C17.2 C18.2 C19.2 C20.2 C21.2 C22.1 D1.2 D2.2 D3.2 J4.1 J8.4 J9.2 J9.3 J9.4 J9.5 J9.6 J10.1 J10.7 J13.4 J14.4 J16.1 J16.7 J18.4 J20.4 J21.1 J21.7 J22.2 J23.1 J24.2 J25.2 J26.3 J26.4 J27.1 J28.1 J29.1 J30.2 J31.2 J32.1 J33.1 pad.5@57.938,29.977 Q1.3 Q2.3 Q3.2 R4.1 R6.1 R7.1 R8.1 R9.1 R10.1 R13.1 R14.1 R15.1 R16.1 R17.1 R23.1 R24.1 R25.1 R26.1 R40.1 U1.2 U2.1 U3.1 U4.1 U5.3 U6.1 U6.15 U6.38 U6.39 | length 32.8
  TopLayer w0.202: 44.143,61.611 46.979,61.611 ; C9.2@56.081,36.306 57.388,36.502 58.706,36.639 59.251,36.957 C11.1@59.838,37.428 ; 59.489,61.452 63.177,61.452
  TopLayer w0.406: C16.2@77.772,37.491 77.772,34.814 81.275,31.311
  TopLayer w0.506: 35.819,36.433 38.486,36.433 R4.1@38.899,36.02
  BottomLayer w0.225: 48.678,64.04 50.721,64.04 ; 65.215,64.098 67.326,64.098
  BottomLayer w0.251: 32.12,64.061 34.539,64.061 ; 76.729,61.521 80.529,61.521 v1@81.248,62.241
  other v1: 70.374,17.785 71.131,17.817 69.517,17.822 71.983,17.843 71.93,18.584 70.31,18.616 71.115,18.616 69.506,18.632 101.298,21.214 103.658,21.214 102.06,21.257 102.928,21.257 93.287,21.405 76.11,21.447 76.936,21.447 92.578,21.5 102.854,22.008 101.277,22.029 102.082,22.019 103.658,22.04 76.999,22.22 93.371,22.283 76.152,22.294 92.535,22.304 76.936,22.982 93.393,23.013 92.514,23.035 76.142,23.088 76.925,23.765 93.371,23.797 76.152,23.818 92.609,23.85 81.508,26.686 46.381,27.162 50.34,27.183 49.482,27.204 51.112,27.215 47.091,27.226 45.524,27.247 47.905,27.247 48.699,27.31 45.588,27.977 49.578,27.998 51.186,27.998 48.763,28.019 46.339,28.041 47.091,28.041 47.905,28.041 50.35,28.093 57.6,30.866 56.891,30.887 40.465,32.771 41.28,32.761 42.127,32.761 42.868,32.792 41.238,33.576 42.825,33.607 40.497,33.639 42.063,33.629 64.13,33.713 64.892,33.777 62.5,33.808 63.357,33.819 101.944,33.957 102.78,33.988 103.457,33.978 101.118,34.01 83.878,34.031 84.746,34.052 64.13,34.57 64.934,34.581 62.51,34.602 63.378,34.602 103.489,34.729 102.706,34.74 101.118,34.782 101.912,34.772 83.899,34.835 84.757,34.856 83.921,35.65 84.757,35.671 84.725,36.423 83.868,36.475 60.33,38.666 24.516,38.793 25.342,38.814 23.712,38.825 26.104,38.836 26.083,39.513 25.289,39.545 24.516,39.619 23.701,39.64 61.812,40.793 63.389,40.804 64.225,40.804 62.627,40.836 48.826,41.037 49.652,41.111 62.659,41.566 64.288,41.587 61.833,41.64 63.452,41.672 49.62,41.841 48.9,41.852 47.218,42.222 46.445,42.275 45.683,42.286 44.826,42.317 111.596,42.392 110.823,42.423 48.943,42.646 49.662,42.73 85.434,42.942 44.889,43.027 47.228,43.048 46.508,43.079 45.662,43.111 110.813,43.175 111.638,43.238 24.537,43.408 49.662,43.408 48.869,43.439 25.268,43.45 26.093,43.45 23.723,43.482 85.413,43.767 111.607,43.979 110.813,44 23.67,44.233 26.093,44.212 24.453,44.297 25.268,44.286 111.585,44.794 110.77,44.836 48.223,50.795 47.45,50.901 48.255,51.567 47.472,51.578 52.88,51.62 44.984,54.414 46.572,54.404 47.355,54.414 45.736,54.446 61.6,54.763 63.272,54.763 64.045,54.763 62.405,54.795 46.561,55.176 47.355,55.208 44.963,55.25 45.768,55.25 63.23,55.557 64.034,55.589 61.579,55.663 62.383,55.642 99.891,55.748 100.759,55.758 99.161,55.79 98.314,55.811 97.51,55.822 96.695,55.875 81.349,56.425 99.923,56.552 99.139,56.594 100.727,56.594 96.695,56.616 97.552,56.626 98.314,56.605 97.562,57.335 100.737,57.335 99.923,57.367 96.758,57.42 98.356,57.43 99.161,57.505 100.737,58.15 96.737,58.192 97.531,58.203 98.303,58.182 99.891,58.192 99.171,58.224 110.866,60.341 111.617,60.341 110.813,61.092 111.659,61.219 110.834,61.918 111.67,61.992 81.359,62.362 111.585,62.743 110.866,62.807 37.618,66.776 71.411,66.786 36.856,66.807 69.802,66.797 70.596,66.807 38.444,66.828 39.238,66.828 53.356,66.818 55.716,66.839 72.226,66.828 54.16,66.85 54.88,66.85 36.825,67.601 39.248,67.59 37.671,67.612 38.465,67.622 72.226,67.622 54.054,67.633 53.345,67.654 54.922,67.665 55.737,67.654 69.802,67.654 70.564,67.654 71.4,67.654 81.306,68.427 81.391,74.258 63.918,77.031 35.459,77.073 65.474,77.094 34.634,77.115 36.19,77.105 63.114,77.115 64.617,77.105 33.84,77.137 46.572,77.137 48.911,77.137 48.202,77.168 47.366,77.2 63.114,77.835 33.819,77.888 34.645,77.888 63.907,77.877 64.744,77.888 36.221,77.899 46.54,77.899 65.495,77.899 35.417,77.92 47.397,77.93 48.17,77.93 48.932,77.92 91.879,81.232 92.684,81.275 91.911,82.09 92.694,82.1 92.705,82.862 91.879,82.926 99.817,83.254 97.435,83.296 98.176,83.317 98.959,83.307 92.684,83.698 91.89,83.709 99.785,84.048 97.372,84.069 98.208,84.079 98.97,84.069
UnNamedNet14: C1.1 C2.1 C4.1 C8.1 C13.1 D4.2 D5.2 J1.2 J2.2 J3.1 J4.2 J5.3 J5.4 J10.8 J16.8 J21.8 J23.2 J25.1 pad.40 pad.41 pad.42 pad.43 pad.44 pad.45 R3.2 R11.1 R12.1 U1.4 U1.5 | length 256.5
  TopLayer w0.251: R3.2@29.998,76.253 29.998,76.898 pad.41@32.247,79.147
  TopLayer w0.356: 34.544,45.402 42.254,45.402 45.625,48.773 R11.1@49.583,48.773 ; R11.1@49.477,48.392 R12.1@49.477,50.165 ; R11.1@49.683,48.339 R12.1@49.683,50.149
  TopLayer w0.381: 34.528,45.418 34.544,45.402
  TopLayer w0.94: 55.187,75.634 J16.8@62.278,75.634 ; C13.1@71.39,75.581 J21.8@79.042,75.581
  TopLayer w0.991: C4.1@38.296,75.634 45.63,75.634 J10.8@45.63,75.613
  TopLayer w1.93: 25.268,60.288 J3.1@26.887,60.288 ; J4.2@26.961,65.453 24.453,62.944 24.453,50.308 28.136,46.625 28.136,40.053 30.898,37.29 33.957,37.29 29.967,37.29 24.516,31.84 24.516,26.771 25.299,25.987 29.162,25.987 34.274,20.876 J5.4@34.274,17.288 ; J2.2@28.305,46.614 34.062,46.614 34.158,46.519 D4.2@34.158,44.233
  TopLayer w1.956: 32.337,79.761 100.251,79.761 101.171,80.682 J25.1@101.171,81.984 ; C8.1@54.499,75.359 54.499,78.925 ; 68.628,79.285 70.977,76.936 C13.1@70.977,75.285 ; 87.688,80.354 J23.2@87.688,81.899
  TopLayer w2.007: C4.1@38.021,75.39 38.021,79.592
  BottomLayer w0.279: 26.998,64.553 27.247,64.553 27.787,65.093 27.787,65.818 27.284,66.32 25.416,66.32 25.13,66.606 25.13,71.247 32.703,78.819 34.316,78.819 34.676,79.179 34.676,80.248 34.406,80.518 31.914,80.518 30.75,79.354 30.75,79.243 23.442,71.935 23.442,65.855 24.739,64.558 27.093,64.558
UnNamedNet15: J25.3 Q1.1 R30.2 | length 97.9
  TopLayer w0.254: Q1.1@46.508,39.587 47.424,39.587 48.138,40.301 48.138,44.381 51.049,47.292 57.632,47.292 58.526,48.186 86.715,48.186 87.223,47.678 87.223,45.985 86.535,45.297 83.423,45.297 82.195,44.069 R30.2@82.195,44.032 ; v1@85.418,54.546 85.746,54.875 85.746,62.346 88.456,65.056 v1@90.588,65.056
  BottomLayer w0.279: v1@80.645,48.271 80.645,53.589 81.629,54.573 v1@85.355,54.573 ; v1@90.646,65.093 90.646,65.119 91.091,65.564 91.091,77.301 J25.3@95.832,82.042
  other v1: 80.576,48.202 85.434,54.573 90.63,65.072
UnNamedNet16: C18.1 J31.1 R31.2 R32.2 | length 33.2
  TopLayer w0.254: R31.2@84.122,54.409 84.122,56.261 84.132,56.272 84.132,58.367 85.233,59.468 85.233,62.521 90.392,67.68 105.765,67.68 J31.1@107.172,69.088
UnNamedNet17: C5.1 C6.1 C9.1 D6.2 J10.2 J16.2 J21.2 J22.3 J24.3 J26.1 J26.2 J30.3 J31.3 L1.2 R2.2 R5.2 R32.1 R34.1 R36.1 R38.1 SW1.1 SW1.2 SW1.3 SW2.1 SW2.2 SW2.3 SW3.1 SW3.2 SW3.3 U2.3 U5.5 | length 252.4
  TopLayer w0.251: R2.2@29.977,74.062 30.491,74.062 31.221,73.332 v1@31.221,58.97
  TopLayer w0.254: 80.719,64.378 R34.1@82.788,64.378 ; v1@81.396,76.168 R38.1@82.545,76.168 ; R32.1@82.407,58.362 81.264,58.362 80.65,58.976 80.65,69.681 81.375,70.406 R36.1@82.471,70.406 ; U5.5@84.01,42.095 84.01,41.296 84.799,40.508 v1@92.033,40.508
  TopLayer w0.356: v1@54.488,46.657 v1@69.929,46.657
  TopLayer w0.533: SW2.1@53.822,57.526 59.706,57.526 J16.2@62.288,60.108 ; SW3.1@70.332,57.579 76.237,57.579 J21.2@78.798,60.14
  TopLayer w0.559: SW1.1@37.322,57.557 43.281,57.557 J10.2@45.852,60.129 ; R38.1@82.566,76.237 82.566,77.179 83.074,77.687 86.027,77.687 89.244,74.47 J31.3@107.468,74.47
  TopLayer w0.584: J26.1@99.616,39.142 J26.2@99.616,41.291
  TopLayer w0.94: R5.2@44.244,35.872 44.138,35.872 44.191,35.819 51.842,35.819 54.345,38.322 54.345,39.026 54.372,39.052 54.695,39.052 55.716,38.031 ; L1.2@45.466,32.041 48.72,32.041 50.932,34.253 C6.1@50.932,35.248 ; D6.2@58.092,38.031 58.267,38.206 58.267,39.254 58.748,39.735 64.627,39.735 65.696,38.666 65.696,35.819 66.881,34.634 v1@68.554,34.634
  BottomLayer w0.279: v1@31.231,58.954 35.597,58.954 SW1.1@36.597,57.954 ; v1@81.306,70.406 81.306,70.427 82.105,71.226 82.105,75.427 v1@81.412,76.121 ; v1@92.213,40.487 98.642,40.487 J26.2@99.446,41.291
  BottomLayer w0.381: J10.2@45.969,60.494 46.186,60.494 47.233,61.542 51.17,61.542 53.478,59.235 SW2.1@53.478,57.573 ; v1@54.017,37.878 54.388,38.248 v1@54.388,46.657 ; J16.2@62.389,60.177 63.775,61.563 67.585,61.563 69.977,59.171 v1@69.977,46.62
  BottomLayer w0.559: v1@68.612,34.618 68.649,34.618 71.051,32.216 92.731,32.216 J26.1@99.568,39.052
  BottomLayer w0.584: J21.2@78.803,60.134 79.497,60.134 v1@81.227,58.404
  other v1: 68.585,34.708 53.991,37.883 92.138,40.518 54.435,46.635 69.961,46.688 81.222,58.404 31.194,58.944 81.317,70.395 81.349,76.163